# Altium PCB Timebase_PCB.PcbDoc (part 2 of 2)
Units mm, origin at the board's own origin, x right, y up, seen from the top; angles counter-clockwise.
Board outline 50 x 100.01 mm, 4 copper layers (Top Layer, Int1 (GND), Int2 (PWR), Bottom Layer), stack 1.369 mm thick; 60 components, 58 nets, 317 pads, 674 vias.
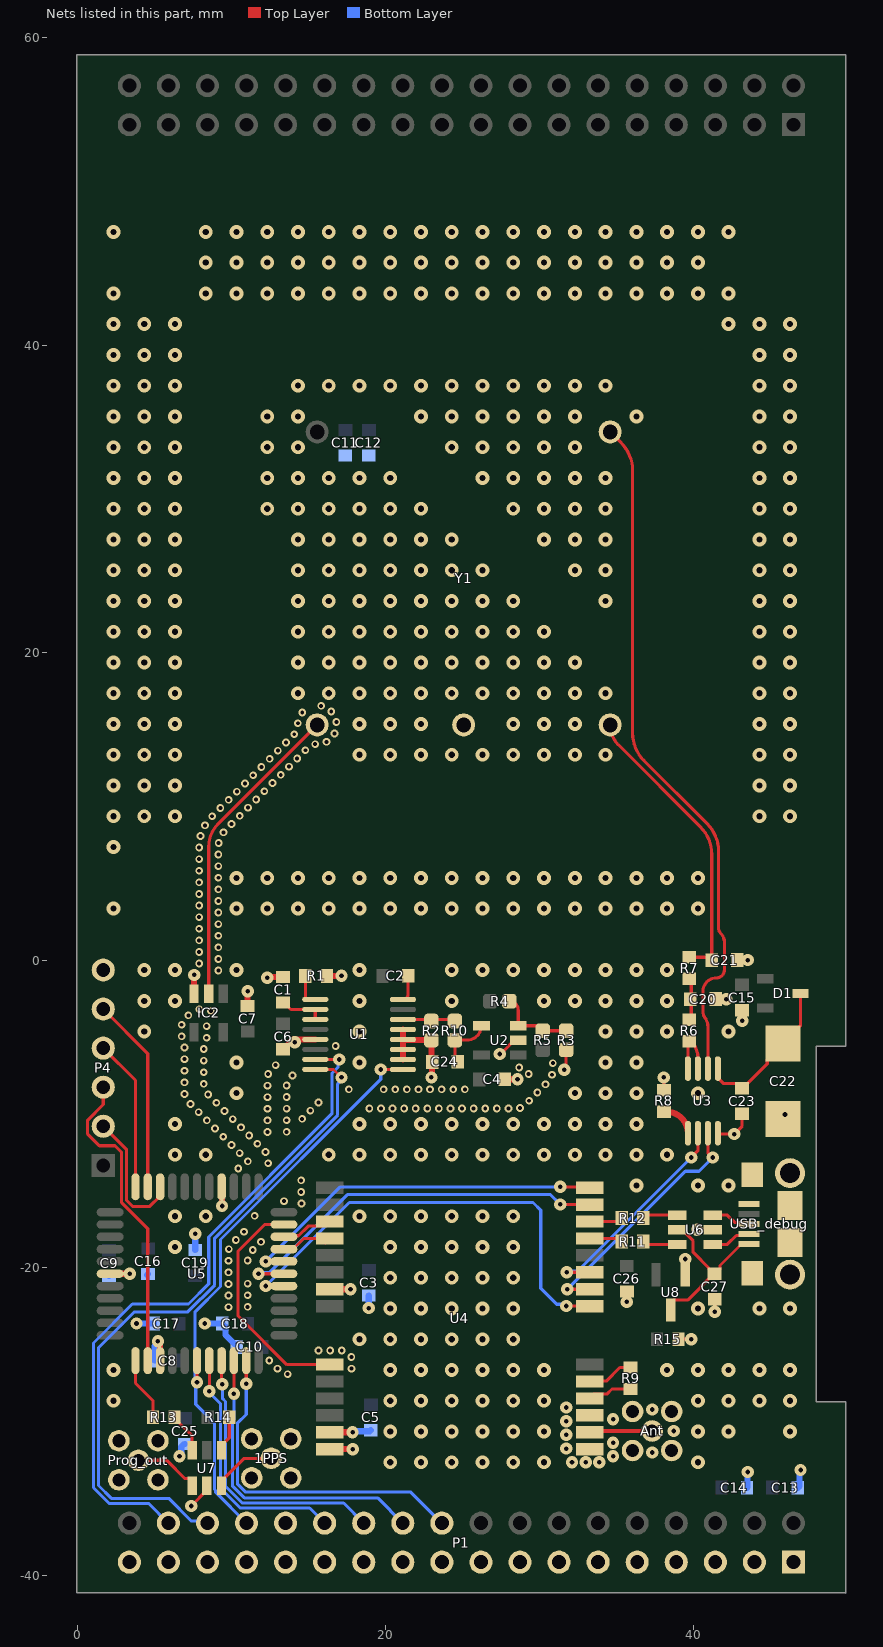
[diagram p4: the nets of this part, all layers, seen from the top]

## Via types
v1: diameter 0.9, hole 0.4, Top Layer to Bottom Layer, tented both sides, 430 vias
v2: diameter 0.5, hole 0.254, Top Layer to Bottom Layer, tented both sides, 163 vias
v3: diameter 0.8, hole 0.3, Top Layer to Bottom Layer, tented both sides, 80 vias
v4: diameter 1.8, hole 1, Top Layer to Bottom Layer, tented both sides, 1 vias

## Nets (pads, with @x,y where several pads share a name; then routed paths per layer and width w, separated by ;. In a path a pad name is that pad's centre, name@x,y a point inside that pad or via, vN(x,y) a via of type N, cw(c..) or ccw(c..) an arc to the next point about the centre after c; other vN are vias at no path point) (continued)
DGND: 1PPS.2 1PPS.3 1PPS.4 1PPS.5 Ant.2 Ant.3 Ant.4 Ant.5 C1.2 C3.1 C4.1 C5.1 C6.1 C7.1 C8.1 C9.1 C10.1 C11.1 C12.1 C13.1 C14.1 C15.1 C16.1 C17.1 C18.1 C19.1 C20.1 C21.1 C22.2 C23.1 C24.1 C25.1 C26.1 C27.1 IC2.3 P1.1 P1.3 P1.5 P1.7 P1.9 P1.11 P1.13 P1.15 P1.17 P1.19 P1.21 P1.23 P1.25 P1.27 P1.28 P1.29 P1.31 P1.33 P1.35 P4.6 Prog_out.2 Prog_out.3 Prog_out.4 Prog_out.5 R1.2 R2.1 R3.2 R8.2 R15.2 U1.5 U1.10 U1.11 U1.12 U1.13 U2.2 U3.8 U4.7 U4.13 U4.14 U4.15 U4.17 U5.4 U5.17 U5.25 U6.2 U7.2 U8.1 USB_debug.5 USB_debug.MH1 USB_debug.MH2 USB_debug.MP1 USB_debug.MP2 USB_debug.MP3 USB_debug.MP4 Y1.2 | length 47.5
  Top Layer w0.203: v3(7.366,-35.486) 8.382,-34.47 U7.2@8.382,-34.17 ; v3@27.62,-5.969 28.382,-5.207 U2.2@28.632,-5.207 ; R3.2@31.616,-5.698 R3.2@31.75,-5.832 v3@31.75,-6.858 ; v3(35.697,-22.215) C26.1@35.697,-21.541 ; R8.2@38.1,-8.444 v3(38.1,-7.62) ; R15.2@39.054,-24.638 v3(39.878,-24.638) ; U8.1@39.492,-20.447 v3(39.492,-19.426) ; v3(40.259,-17.526) U6.2@41.282,-17.526 ; v3(41.412,-22.85) C27.1@41.412,-22.049 ; C20.1@41.48,-2.53 v3(42.154,-2.53) ; U3.8@41.615,-11.244 41.674,-11.303 v3(42.672,-11.303) 43.19,-10.785 C23.1@43.19,-9.984 ; C21.1@42.877,0.01 v3(43.551,0.01) ; v3(43.19,-3.927) C15.1@43.19,-3.253
  Top Layer w0.4: U5.17@2.097,-20.382 v3(3.367,-20.382) ; U5.25@5.347,-26.032 v3@5.347,-24.765 ; IC2.3@7.559,-2.179 v3(7.559,-0.955) ; U5.4@9.347,-14.732 9.376,-14.761 v3(9.376,-15.98) ; C7.1@11.039,-2.97 v3(11.039,-2.022) ; v3@12.515,-1.085 C1.2@13.335,-1.085 ; C6.1@13.345,-5.793 13.395,-5.793 13.595,-5.593 13.595,-5.544 13.988,-5.151 U1.5@15.438,-5.151 ; R1.2@16.194,-1.016 v3(17.145,-1.016) ; U4.14@16.383,-31.789 v3(17.868,-31.789) ; U4.13@16.383,-30.689 v3(17.862,-30.689) ; U4.7@16.383,-21.389 v3(17.727,-21.389) ; U1.10@21.138,-6.451 U1.11@21.138,-5.801 U1.12@21.138,-5.151 ; U1.13@21.138,-4.501 U1.12@21.138,-5.151 ; v3@23.036,-7.444 C24.1@23.036,-6.614 cw(c23.036,-6.565) 22.987,-6.565 R2.1@22.987,-5.197 21.184,-5.197 cw(c21.184,-5.151) U1.12@21.138,-5.151 ; C4.1@27.764,-7.737 v3(28.585,-7.737)
  Bottom Layer w0.4: C9.1@2.022,-20.525 C9.1@2.086,-20.462 ; v3(3.81,-23.622) C17.1@4.953,-23.622 ; C16.1@4.499,-20.462 C16.1@4.562,-20.398 ; C8.1@5.002,-26.025 5.002,-25.078 5.207,-24.873 v3(5.207,-24.765) ; v3(6.605,-32.258) 6.605,-32.15 6.725,-32.03 6.725,-31.647 6.925,-31.447 C25.1@6.975,-31.447 ; C19.1@7.63,-18.845 v3(7.63,-17.79) ; v3(8.255,-23.622) C18.1@9.398,-23.622 9.598,-23.822 9.598,-24.348 10.336,-25.086 C10.1@10.336,-25.136 ; v3(17.862,-30.689) 17.928,-30.623 18.975,-30.623 C5.1@19.04,-30.558 ; v3(18.913,-22.616) C3.1@18.913,-21.795 ; C14.1@43.512,-34.3 43.536,-34.276 43.536,-33.299 v3(43.561,-33.274) ; C13.1@46.814,-34.3 46.913,-34.201 46.913,-33.224 v3(46.99,-33.147)
  other v1: 20.313,-32.643 22.313,-32.643 24.313,-32.643 26.313,-32.643 28.313,-32.643 30.313,-32.643 40.313,-32.643 20.313,-30.643 22.313,-30.643 24.313,-30.643 26.313,-30.643 28.313,-30.643 30.313,-30.643 40.313,-30.643 42.313,-30.643 46.313,-30.643 2.313,-28.643 20.313,-28.643 22.313,-28.643 24.313,-28.643 26.313,-28.643 28.313,-28.643 30.313,-28.643 40.313,-28.643 42.313,-28.643 44.313,-28.643 46.313,-28.643 2.313,-26.643 20.313,-26.643 22.313,-26.643 24.313,-26.643 26.313,-26.643 28.313,-26.643 30.313,-26.643 38.313,-26.643 40.313,-26.643 42.313,-26.643 44.313,-26.643 46.313,-26.643 18.313,-24.643 20.313,-24.643 22.313,-24.643 24.313,-24.643 26.313,-24.643 28.313,-24.643 20.313,-22.643 22.313,-22.643 24.313,-22.643 26.313,-22.643 28.313,-22.643 40.313,-22.643 44.313,-22.643 46.313,-22.643 20.313,-20.643 22.313,-20.643 24.313,-20.643 26.313,-20.643 28.313,-20.643 6.313,-18.643 20.313,-18.643 22.313,-18.643 24.313,-18.643 26.313,-18.643 28.313,-18.643 6.313,-16.643 8.313,-16.643 18.313,-16.643 20.313,-16.643 22.313,-16.643 24.313,-16.643 26.313,-16.643 28.313,-16.643 36.313,-14.643 40.313,-14.643 42.313,-14.643 6.313,-12.643 8.313,-12.643 16.313,-12.643 18.313,-12.643 20.313,-12.643 22.313,-12.643 24.313,-12.643 26.313,-12.643 28.313,-12.643 30.313,-12.643 32.313,-12.643 34.313,-12.643 36.313,-12.643 38.313,-12.643 6.313,-10.643 18.313,-10.643 20.313,-10.643 22.313,-10.643 24.313,-10.643 26.313,-10.643 28.313,-10.643 30.313,-10.643 32.313,-10.643 34.313,-10.643 36.313,-10.643 10.313,-8.643 32.313,-8.643 34.313,-8.643 36.313,-8.643 40.313,-8.643 10.313,-6.643 18.313,-6.643 34.313,-6.643 36.313,-6.643 4.313,-4.643 18.313,-4.643 34.313,-4.643 36.313,-4.643 38.313,-4.643 42.313,-4.643 4.313,-2.643 6.313,-2.643 18.313,-2.643 24.313,-2.643 30.313,-2.643 32.313,-2.643 34.313,-2.643 36.313,-2.643 38.313,-2.643 4.313,-0.643 6.313,-0.643 10.313,-0.643 18.313,-0.643 24.313,-0.643 26.313,-0.643 28.313,-0.643 30.313,-0.643 32.313,-0.643 34.313,-0.643 36.313,-0.643 38.313,-0.643 2.313,3.357 10.313,3.357 12.313,3.357 14.313,3.357 16.313,3.357 18.313,3.357 20.313,3.357 22.313,3.357 24.313,3.357 26.313,3.357 28.313,3.357 30.313,3.357 32.313,3.357 34.313,3.357 36.313,3.357 38.313,3.357 40.313,3.357 10.313,5.357 12.313,5.357 14.313,5.357 16.313,5.357 18.313,5.357 20.313,5.357 22.313,5.357 24.313,5.357 26.313,5.357 28.313,5.357 30.313,5.357 32.313,5.357 34.313,5.357 36.313,5.357 38.313,5.357 40.313,5.357 2.313,7.357 2.313,9.357 4.313,9.357 6.313,9.357 44.313,9.357 46.313,9.357 2.313,11.357 4.313,11.357 6.313,11.357 44.313,11.357 46.313,11.357 2.313,13.357 4.313,13.357 6.313,13.357 18.313,13.357 20.313,13.357 22.313,13.357 24.313,13.357 26.313,13.357 28.313,13.357 30.313,13.357 32.313,13.357 34.313,13.357 44.313,13.357 46.313,13.357 2.313,15.357 4.313,15.357 6.313,15.357 18.313,15.357 20.313,15.357 22.313,15.357 28.313,15.357 30.313,15.357 32.313,15.357 44.313,15.357 46.313,15.357 2.313,17.357 4.313,17.357 6.313,17.357 14.313,17.357 16.313,17.357 18.313,17.357 20.313,17.357 22.313,17.357 24.313,17.357 26.313,17.357 28.313,17.357 30.313,17.357 32.313,17.357 34.313,17.357 44.313,17.357 46.313,17.357 2.313,19.357 4.313,19.357 6.313,19.357 14.313,19.357 16.313,19.357 18.313,19.357 20.313,19.357 22.313,19.357 24.313,19.357 26.313,19.357 28.313,19.357 30.313,19.357 32.313,19.357 44.313,19.357 46.313,19.357 2.313,21.357 4.313,21.357 6.313,21.357 14.313,21.357 16.313,21.357 18.313,21.357 20.313,21.357 22.313,21.357 24.313,21.357 26.313,21.357 28.313,21.357 30.313,21.357 44.313,21.357 46.313,21.357 2.313,23.357 4.313,23.357 6.313,23.357 14.313,23.357 16.313,23.357 18.313,23.357 20.313,23.357 22.313,23.357 24.313,23.357 26.313,23.357 28.313,23.357 34.313,23.357 44.313,23.357 46.313,23.357 2.313,25.357 4.313,25.357 6.313,25.357 14.313,25.357 16.313,25.357 18.313,25.357 20.313,25.357 22.313,25.357 24.313,25.357 26.313,25.357 32.313,25.357 34.313,25.357 44.313,25.357 46.313,25.357 2.313,27.357 4.313,27.357 6.313,27.357 14.313,27.357 16.313,27.357 18.313,27.357 20.313,27.357 22.313,27.357 24.313,27.357 30.313,27.357 32.313,27.357 34.313,27.357 44.313,27.357 46.313,27.357 2.313,29.357 4.313,29.357 6.313,29.357 12.313,29.357 14.313,29.357 16.313,29.357 18.313,29.357 20.313,29.357 22.313,29.357 28.313,29.357 30.313,29.357 32.313,29.357 34.313,29.357 44.313,29.357 46.313,29.357 2.313,31.357 4.313,31.357 6.313,31.357 12.313,31.357 14.313,31.357 16.313,31.357 18.313,31.357 20.313,31.357 26.313,31.357 28.313,31.357 30.313,31.357 32.313,31.357 34.313,31.357 44.313,31.357 46.313,31.357 2.313,33.357 4.313,33.357 6.313,33.357 12.313,33.357 14.313,33.357 24.313,33.357 26.313,33.357 28.313,33.357 30.313,33.357 32.313,33.357 44.313,33.357 46.313,33.357 2.313,35.357 4.313,35.357 6.313,35.357 12.313,35.357 14.313,35.357 22.313,35.357 24.313,35.357 26.313,35.357 28.313,35.357 30.313,35.357 32.313,35.357 36.313,35.357 44.313,35.357 46.313,35.357 2.313,37.357 4.313,37.357 6.313,37.357 14.313,37.357 16.313,37.357 18.313,37.357 20.313,37.357 22.313,37.357 24.313,37.357 26.313,37.357 28.313,37.357 30.313,37.357 32.313,37.357 34.313,37.357 44.313,37.357 46.313,37.357 2.313,39.357 4.313,39.357 6.313,39.357 44.313,39.357 46.313,39.357 2.313,41.357 4.313,41.357 6.313,41.357 42.313,41.357 44.313,41.357 46.313,41.357 2.313,43.357 8.313,43.357 10.313,43.357 12.313,43.357 14.313,43.357 16.313,43.357 18.313,43.357 20.313,43.357 22.313,43.357 24.313,43.357 26.313,43.357 28.313,43.357 30.313,43.357 32.313,43.357 34.313,43.357 36.313,43.357 38.313,43.357 40.313,43.357 42.313,43.357 8.313,45.357 10.313,45.357 12.313,45.357 14.313,45.357 16.313,45.357 18.313,45.357 20.313,45.357 22.313,45.357 24.313,45.357 26.313,45.357 28.313,45.357 30.313,45.357 32.313,45.357 34.313,45.357 36.313,45.357 38.313,45.357 40.313,45.357 2.313,47.357 8.313,47.357 10.313,47.357 12.313,47.357 14.313,47.357 16.313,47.357 18.313,47.357 20.313,47.357 22.313,47.357 24.313,47.357 26.313,47.357 28.313,47.357 30.313,47.357 32.313,47.357 34.313,47.357 36.313,47.357 38.313,47.357 40.313,47.357 42.313,47.357
  other v2: 13.64,-26.913 12.975,-26.557 17.797,-26.554 12.442,-26.024 17.779,-25.8 15.649,-25.375 16.403,-25.375 17.157,-25.375 9.79,-22.557 11.038,-22.537 9.79,-21.803 11.038,-21.783 9.79,-21.049 11.038,-21.029 9.79,-20.295 9.79,-19.541 11.038,-19.521 11.374,-18.846 9.817,-18.787 11.907,-18.312 10.27,-18.185 10.803,-17.651 11.495,-16.62 14.542,-15.818 13.408,-15.662 14.519,-15.064 14.519,-14.31 10.428,-13.542 12.371,-13.2 11.051,-13.076 10.518,-12.543 12.199,-12.466 9.985,-12.01 11.669,-11.93 9.452,-11.477 11.136,-11.397 12.33,-11.167 13.578,-11.157 8.919,-10.944 10.603,-10.864 8.386,-10.411 12.33,-10.413 13.578,-10.403 10.07,-10.33 14.584,-10.315 7.852,-9.877 9.536,-9.797 15.117,-9.782 12.33,-9.659 13.578,-9.649 18.95,-9.641 19.704,-9.641 20.458,-9.641 21.212,-9.641 21.966,-9.641 22.72,-9.641 23.474,-9.641 24.228,-9.641 24.982,-9.641 25.736,-9.641 26.49,-9.641 27.244,-9.641 27.998,-9.641 28.751,-9.606 7.319,-9.344 9.003,-9.264 15.65,-9.249 29.34,-9.134 12.33,-8.905 13.578,-8.895 8.47,-8.731 6.935,-8.695 29.873,-8.601 17.619,-8.393 19.881,-8.393 20.635,-8.393 21.389,-8.393 22.143,-8.393 22.897,-8.393 23.651,-8.393 24.405,-8.393 25.159,-8.393 12.33,-8.151 13.578,-8.141 30.406,-8.068 8.183,-8.034 6.935,-7.941 13.957,-7.489 30.834,-7.447 12.376,-7.398 29.307,-7.403 8.183,-7.28 6.935,-7.187 28.689,-6.971 12.861,-6.821 30.881,-6.694 8.183,-6.526 6.935,-6.433 8.183,-5.772 6.935,-5.679 16.76,-5.579 8.373,-5.042 6.745,-4.95 8.373,-4.288 6.745,-4.196 7.181,-3.581 8.645,-3.293 7.9,-3.178 9.133,-0.669 7.885,-0.215 9.133,0.085 7.885,0.539 9.133,0.839 7.885,1.293 9.133,1.593 7.885,2.047 9.133,2.347 7.885,2.801 9.133,3.101 7.885,3.555 9.133,3.855 7.885,4.309 9.133,4.609 7.885,5.063 9.133,5.363 7.885,5.817 9.133,6.117 7.885,6.571 9.133,6.871 7.885,7.325 9.153,7.625 7.979,8.073 9.465,8.312 8.269,8.769 9.99,8.853 8.735,9.362 10.523,9.386 9.268,9.895 11.056,9.919 9.801,10.428 11.59,10.452 10.334,10.961 12.123,10.986 10.868,11.495 12.656,11.519 11.401,12.028 13.189,12.052 11.934,12.561 13.722,12.585 12.467,13.094 14.255,13.118 13,13.627 14.788,13.651 15.429,14.049 13.533,14.16 16.168,14.201 14.066,14.694 16.691,14.744 14.301,15.41 16.805,15.489 14.587,16.108 16.476,16.168 15.82,16.54
  other v3: 32.131,-32.639 33.02,-32.639 33.909,-32.639 34.798,-32.258 37.338,-32.004 31.75,-31.75 34.798,-31.369 31.75,-30.861 38.735,-30.607 31.75,-29.972 34.798,-29.845 37.338,-29.21 31.75,-29.083 45.974,-10.033 22.987,-7.62 31.623,-7.112 27.432,-6.096 14.097,-5.334 12.319,-1.143
"Disciplined 30.72 MHz": U4.9 U5.43 | length 15.2
  Top Layer w0.203: U5.43@13.397,-17.182 12.155,-17.182 10.414,-18.923 10.414,-23.114 13.589,-26.289 U4.9@16.383,-26.289
EFC: C21.2 R7.1 Y1.3 | length 19.4
  Top Layer w0.203: Y1.3@34.608,15.303 ccw(c36.448,15.303) 35.147,14.002 40.473,8.676 cw(c38.677,6.88) 41.217,6.88 C21.2@41.217,0 ccw(c40.753,-0.464) 40.753,0.192 R7.1@39.751,0.192
External_freq_out: R13.1 U5.23 | length 4.2
  Top Layer w0.203: U5.23@3.747,-26.032 3.747,-27.496 4.888,-28.637 R13.1@4.888,-29.718
Freq_control_b0: P1.20 U5.32 | length 22.9
  Top Layer w0.203: v3(10.947,-27.534) U5.32@10.947,-26.032
  Top Layer w0.4: P1.20@23.667,-36.596 P1.20@23.667,-36.298
  Bottom Layer w0.203: v3(10.947,-27.534) 10.947,-29.533 10.375,-30.106 10.375,-34.04 10.918,-34.583 21.655,-34.583 P1.20@23.667,-36.596
Freq_control_b1: P1.22 U5.31 | length 20.3
  Top Layer w0.203: v3(10.147,-28.181) U5.31@10.147,-26.032
  Bottom Layer w0.203: v3(10.147,-28.181) 10.147,-29.866 10.045,-29.969 10.045,-34.176 10.826,-34.958 19.489,-34.958 P1.22@21.127,-36.596
Freq_control_b2: P1.24 U5.30 | length 18
  Top Layer w0.203: v3@9.347,-27.356 U5.30@9.347,-26.032
  Bottom Layer w0.203: v3(9.398,-27.559) 9.398,-28.488 9.601,-28.691 9.601,-34.199 10.689,-35.288 17.279,-35.288 P1.24@18.587,-36.596
Freq_control_b3: P1.26 U5.29 | length 16.3
  Top Layer w0.203: v3(8.547,-28.029) U5.29@8.547,-26.032
  Bottom Layer w0.203: v3(8.547,-28.029) 8.547,-28.103 9.271,-28.827 9.271,-34.336 10.552,-35.618 15.069,-35.618 P1.26@16.047,-36.596
FREQ_PHASE_IN0: U4.27 U5.39 | length 25.6
  Top Layer w0.203: v3(11.746,-20.382) U5.39@13.397,-20.382 ; v3(31.369,-15.875) 33.26,-15.875 U4.27@33.274,-15.889
  Bottom Layer w0.203: v3(11.746,-20.382) 11.812,-20.316 12.45,-20.316 17.526,-15.24 30.734,-15.24 v3(31.369,-15.875)
FREQ_PHASE_IN1: U4.21 U5.38 | length 30.3
  Top Layer w0.203: v3(12.219,-21.182) U5.38@13.397,-21.182 ; v3(31.75,-22.479) 33.264,-22.479 U4.21@33.274,-22.489
  Bottom Layer w0.203: v3(12.219,-21.182) 17.653,-15.748 29.591,-15.748 30.099,-16.256 30.099,-21.336 31.128,-22.365 31.636,-22.365 v3(31.75,-22.479)
Hysteresis: R3.1 R4.1 R5.2 U2.3 | length 5.2
  Top Layer w0.203: R4.1@28.057,-2.667 cw(c28.057,-3.242) 28.632,-3.242 U2.3@28.632,-4.257 29.901,-4.257 cw(c29.901,-4.582) R5.2@30.226,-4.582 R3.1@31.75,-4.582
Net1PPS_1: 1PPS.1 U7.3 | length 4.2
  Top Layer w0.203: U7.3@9.332,-34.17 9.332,-33.87 10.817,-32.385 1PPS.1@12.573,-32.385
NetAnt_1: Ant.1 U4.16 | length 4.1
  Top Layer w0.203: U4.16@33.274,-30.689 U4.16@33.356,-30.607
  Top Layer w0.245: U4.16@33.356,-30.607 Ant.1@37.338,-30.607
NetC1_1: C1.1 U1.2 U1.3 | length 2.9
  Top Layer w0.203: C1.1@13.345,-2.745 13.395,-2.745 13.851,-3.201 U1.2@15.438,-3.201 U1.3@15.438,-3.851
NetC2_2: C2.2 U1.16 | length 1.7
  Top Layer w0.203: U1.16@21.138,-2.551 ccw(c21.138,-2.217) 21.472,-2.217 C2.2@21.472,-1.006
NetC20_2: C20.2 R6.1 R7.2 | length 2.7
  Top Layer w0.203: R7.2@39.751,-1.208 cw(c39.444,-1.515) 39.878,-1.515 39.878,-2.54 R6.1@39.878,-3.872
NetC22_1: C22.1 C23.2 D1.3 U3.1 | length 10.2
  Top Layer w0.203: U3.1@41.615,-7.044 41.615,-7.644 41.996,-8.025 42.881,-8.025 C23.2@43.18,-8.324 43.23,-8.324 44.823,-6.73 44.823,-6.448 C22.1@45.847,-5.424 45.847,-5.374 46.99,-4.231 D1.3@46.99,-2.159
NetC24_2: C24.2 R10.1 U2.4 | length 3.8
  Top Layer w0.203: C24.2@24.696,-6.604 cw(c24.696,-6.419) 24.511,-6.419 R10.1@24.511,-5.197 25.292,-5.197 ccw(c25.292,-4.257) U2.4@26.232,-4.257
NetC27_2: C27.2 U6.5 U8.3 USB_debug.1 | length 11.3
  Top Layer w0.203: U8.3@38.542,-22.747 38.542,-22.297 38.74,-22.099 39.642,-22.099 C27.2@41.352,-20.389 ; U6.5@38.982,-17.526 39.282,-17.526 40.005,-18.249 40.005,-18.992 41.053,-20.04 41.053,-20.09 C27.2@41.352,-20.389 ; USB_debug.1@43.628,-18.445 43.153,-18.445 41.751,-19.847 41.751,-20.09 41.452,-20.389 C27.2@41.402,-20.389 C27.2@41.352,-20.389
NetIC2_2: IC2.2 Y1.1 | length 20.3
  Top Layer w0.203: IC2.2@8.509,-2.179 8.509,7.387 ; 8.509,7.388 cw(c10.594,7.39) 9.123,8.868 Y1.1@15.558,15.303
NetP4_2: P4.2 U5.9 | length 8.8
  Top Layer w0.203: P4.2@1.651,-10.795 1.905,-10.795 1.905,-11.049 3.175,-12.319 3.175,-15.621 3.556,-16.002 4.677,-16.002 5.347,-15.332 U5.9@5.347,-14.732
NetP4_3: P4.3 U5.24 | length 20.4
  Top Layer w0.203: P4.3@1.651,-8.255 1.651,-9.383 0.635,-10.399 0.635,-11.303 1.397,-12.065 2.413,-12.065 2.845,-12.497 2.845,-15.758 4.547,-17.46 U5.24@4.547,-26.032
NetP4_4: P4.4 U5.11 | length 9.9
  Top Layer w0.203: P4.4@1.651,-5.715 3.747,-7.811 U5.11@3.747,-14.732
NetP4_5: P4.5 U5.10 | length 12.8
  Top Layer w0.203: P4.5@1.651,-3.175 4.547,-6.071 U5.10@4.547,-14.732
NetProg_out_1: Prog_out.1 U7.1 | length 4.3
  Top Layer w0.203: Prog_out.1@3.937,-32.512 5.774,-32.512 6.97,-33.708 7.234,-33.708 7.432,-33.906 U7.1@7.432,-34.17
NetR1_1: R1.1 U1.1 | length 2.4
  Top Layer w0.203: R1.1@14.524,-1 R1.1@14.667,-1.143 ; R1.1@14.794,-1.016 14.794,-2.483 14.862,-2.551 U1.1@15.438,-2.551 U1.1@15.41,-2.523
NetR6_2: R6.2 U3.3 U3.4 | length 3.7
  Top Layer w0.203: U3.4@39.665,-7.044 39.665,-5.786 cw(c40.392,-5.786) 39.878,-5.272 cw(c38.823,-6.327) 40.315,-6.327 U3.3@40.315,-7.044
NetR8_1: R8.1 U3.5 | length 2.4
  Top Layer w0.4: R8.1@38.1,-9.844 38.265,-9.844 cw(c38.265,-11.244) U3.5@39.665,-11.244
NetR9_1: R9.1 U4.19 | length 3
  Top Layer w0.203: U4.19@33.274,-27.389 33.301,-27.362 34.36,-27.362 35.244,-26.478 R9.1@35.941,-26.478
NetR9_2: R9.2 U4.18 | length 2.9
  Top Layer w0.203: U4.18@33.274,-28.489 33.573,-28.19 34.421,-28.19 34.733,-27.878 R9.2@35.941,-27.878
NetR11_1: R11.1 U4.25 | length 2.4
  Top Layer w0.203: U4.25@33.274,-18.089 R11.1@35.677,-18.089
NetR11_2: R11.2 U6.6 | length 2.3
  Top Layer w0.203: R11.2@36.768,-18.288 36.956,-18.476 U6.6@38.982,-18.476
NetR12_1: R12.1 U4.26 | length 2.4
  Top Layer w0.203: U4.26@33.274,-16.989 R12.1@35.651,-16.989
NetR12_2: R12.2 U6.4 | length 2.3
  Top Layer w0.203: R12.2@36.768,-16.764 36.956,-16.576 U6.4@38.982,-16.576
NetR13_2: R13.2 U7.6 | length 2.6
  Top Layer w0.203: R13.2@6.288,-29.718 6.288,-29.768 7.432,-30.912 U7.6@7.432,-31.87
NetR14_2: R14.2 U7.4 | length 2.4
  Top Layer w0.203: U7.4@9.332,-31.87 9.332,-31.57 9.844,-31.058 R14.2@9.844,-29.718
NetU6_1: U6.1 USB_debug.2 | length 2.6
  Top Layer w0.203: U6.1@41.282,-18.476 42.23,-18.476 42.813,-17.893 43.53,-17.893 USB_debug.2@43.628,-17.795
NetU6_3: U6.3 USB_debug.3 | length 2.6
  Top Layer w0.203: U6.3@41.282,-16.576 42.23,-16.576 42.701,-17.047 43.53,-17.047 USB_debug.3@43.628,-17.145
SCL_DAC: U3.6 U4.23 | length 14.4
  Top Layer w0.203: v3(31.781,-20.289) U4.23@33.274,-20.289 ; v3(39.878,-12.827) 40.315,-12.39 U3.6@40.315,-11.244
  Bottom Layer w0.203: v3(31.781,-20.289) 31.851,-20.219 32.486,-20.219 v3(39.878,-12.827)
SDA_DAC: U3.7 U4.22 | length 16.2
  Top Layer w0.203: v3(31.824,-21.389) U4.22@33.274,-21.389 ; U3.7@40.965,-11.244 40.965,-12.517 v3(41.275,-12.827)
  Bottom Layer w0.203: v3(31.824,-21.389) 39.497,-13.716 40.386,-13.716 v3(41.275,-12.827)
SPI2_MOSI: P1.32 U1.8 | length 45.2
  Top Layer w0.203: U1.8@15.24,-7.15 U1.8@15.289,-7.101 ; U1.8@15.438,-7.101 16.626,-7.101 v3(17.145,-7.62)
  Bottom Layer w0.203: P1.32@8.427,-36.596 8.287,-36.456 7.373,-36.456 5.906,-34.989 2.182,-34.989 1.346,-34.153 1.346,-25.197 3.683,-22.86 7.153,-22.86 8.89,-21.123 8.89,-18.075 16.891,-10.074 16.891,-8.036 17.145,-7.782 v3(17.145,-7.62)
SPI2_NSS: P1.30 U1.9 U5.28 | length 38.8
  Top Layer w0.203: v3(7.747,-27.432) U5.28@7.747,-26.032 ; v3(19.696,-7.101) U1.9@21.138,-7.101
  Bottom Layer w0.203: P1.30@10.967,-36.596 8.966,-34.595 8.966,-34.498 8.884,-34.415 8.884,-30.093 7.664,-28.873 7.664,-27.515 v3(7.747,-27.432) 7.633,-27.318 7.633,-27.021 7.626,-27.015 7.626,-22.854 9.271,-21.209 9.271,-18.161 19.696,-7.736 v3(19.696,-7.101)
SPI2_SCK: P1.34 U1.7 | length 45
  Top Layer w0.203: P1.34@5.639,-36.348 P1.34@5.887,-36.596 ; U1.7@14.763,-6.451 U1.7@15.438,-6.451 v3(16.992,-6.451)
  Bottom Layer w0.203: P1.34@5.887,-36.596 4.61,-35.319 2.045,-35.319 1.016,-34.29 1.016,-24.884 3.548,-22.352 7.195,-22.352 8.509,-21.038 8.509,-17.99 16.516,-9.982 16.516,-7.36 16.913,-6.963 16.913,-6.53 v3(16.992,-6.451)
"Syntesis freq": R2.2 R10.2 U1.14 | length 3.4
  Top Layer w0.203: U1.14@21.138,-3.851 24.415,-3.851 cw(c24.415,-3.947) R10.2@24.511,-3.947
TIMEPULSE: U4.28 U5.40 | length 24.3
  Top Layer w0.203: v3(12.216,-19.582) U5.40@13.397,-19.582 ; v3(31.369,-14.732) 33.217,-14.732 U4.28@33.274,-14.789
  Bottom Layer w0.203: v3(12.216,-19.582) 17.066,-14.732 v3(31.369,-14.732)
UART_RXD: U4.4 U5.41 | length 4.1
  Top Layer w0.203: U5.41@13.016,-18.909 13.857,-18.909 14.677,-18.089 U4.4@16.383,-18.089 U4.4@16.084,-18.388
UART_TXD: U4.3 U5.42 | length 3.8
  Top Layer w0.203: U5.42@13.016,-18.109 13.209,-17.916 14.342,-17.916 14.973,-17.285 16.087,-17.285 U4.3@16.383,-16.989
VREF: U3.2 Y1.4 | length 45
  Top Layer w0.203: Y1.4@34.608,34.353 35.324,33.637 cw(c33.528,31.841) 36.068,31.841 36.068,14.768 ccw(c38.608,14.768) 36.812,12.972 40.912,8.872 cw(c39.116,7.076) 41.656,7.076 41.656,2.085 ccw(c42.09,2.085) 41.783,1.778 cw(c41.17,1.165) 42.037,1.165 42.037,-0.635 cw(c41.529,-0.635) 41.529,-1.143 ccw(c41.529,-2.032) 40.64,-2.032 40.64,-3.355 ccw(c41.27,-3.355) 40.698,-3.618 ccw(c41.27,-3.355) 40.825,-3.8 cw(c39.855,-4.341) 40.965,-4.341 U3.2@40.965,-7.044
pads on no net: D1.2 IC2.1 P2.1 P2.2 P2.3 P2.4 P2.5 P2.6 P2.7 P2.8 P2.9 P2.10 P2.11 P2.12 P2.13 P2.14 P2.15 P2.16 P2.17 P2.18 P2.19 P2.20 P2.21 P2.22 P2.23 P2.24 P2.25 P2.26 P2.27 P2.28 P2.29 P2.30 P2.31 P2.32 P2.33 P2.34 P2.35 P2.36 U4.1 U4.2 U4.5 U4.8 U4.10 U4.12 U4.20 U5.3 U5.5 U5.6 U5.7 U5.8 U5.12 U5.13 U5.14 U5.16 U5.18 U5.19 U5.20 U5.21 U5.22 U5.37 USB_debug.4

## Polygon pours and split planes (outlines as drawn)
DGND on Top Layer "Top Layer-DGND" (solid, pour order 200): 15.853,16.789 16.046,16.738 16.227,16.662 16.401,16.562 16.556,16.443 16.698,16.301 16.817,16.146 16.917,15.972 16.993,15.791 17.044,15.598 17.07,15.403 17.07,15.203 17.044,15.008 16.993,14.815 16.917,14.634 16.817,14.46 16.698,14.305 16.556,14.163 16.401,14.044 16.227,13.944 16.046,13.868 15.853,13.817 15.658,13.791 15.458,13.791 15.304,13.811 9.742,8.249 9.741,8.248 9.735,8.243 9.587,8.063 9.475,7.854 9.406,7.627 9.384,7.397 9.384,7.391 9.384,7.39 9.384,7.388 9.384,7.387 9.384,-1.082 9.472,-1.196 9.549,-1.381 9.575,-1.579 9.575,-2.779 9.549,-2.977 9.472,-3.162 9.35,-3.32 9.192,-3.442 9.007,-3.519 8.809,-3.545 8.209,-3.545 8.011,-3.519 7.826,-3.442 7.668,-3.32 7.546,-3.162 7.469,-2.977 7.443,-2.779 7.443,-1.579 7.469,-1.381 7.546,-1.196 7.634,-1.082 7.634,7.372 7.631,7.387 7.636,7.424 7.635,7.465 7.677,7.894 7.694,7.967 7.706,8.041 7.832,8.453 7.862,8.522 7.889,8.592 8.092,8.972 8.136,9.033 8.175,9.097 8.449,9.43 8.482,9.461 8.505,9.49 8.515,9.498 14.066,15.049 14.046,15.203 14.046,15.403 14.072,15.598 14.123,15.791 14.199,15.972 14.299,16.146 14.418,16.301 14.56,16.443 14.715,16.562 14.889,16.662 15.07,16.738 15.263,16.789 15.458,16.815 15.658,16.815
DGND on Top Layer "Top Layer-DGND 1" (solid, pour order 199): 188 vertices, not listed, extent 9.539,-27.455 18.049,-16.136
DGND on Top Layer "Top Layer-DGND 2" (solid, pour order 198): 267 vertices, not listed, extent 11.753,-17.428 31.471,-4.587
DGND on Top Layer "Top Layer-DGND 3" (solid, pour order 197): 247 vertices, not listed, extent 9.901,-16.877 17.055,-4.857
DGND on Top Layer "Top Layer-DGND 4" (solid, pour order 196): 8.057,-3.339 8.242,-3.416 8.4,-3.538 8.522,-3.696 8.599,-3.881 8.625,-4.079 8.625,-5.279 8.599,-5.477 8.522,-5.662 8.434,-5.776 8.434,-8.339 12.366,-12.271 12.397,-12.311 12.432,-12.346 12.457,-12.39 12.488,-12.43 12.507,-12.476 12.532,-12.519 12.564,-12.597 12.577,-12.645 12.596,-12.692 12.603,-12.742 12.616,-12.79 12.616,-12.84 12.622,-12.89 12.622,-13.569 12.643,-13.599 12.665,-13.644 12.693,-13.686 12.709,-13.734 12.731,-13.779 12.741,-13.828 12.757,-13.875 12.778,-13.983 12.783,-14.058 12.793,-14.132 12.793,-15.332 12.783,-15.406 12.778,-15.481 12.757,-15.589 12.741,-15.636 12.731,-15.685 12.709,-15.73 12.693,-15.778 12.665,-15.82 12.643,-15.865 12.582,-15.956 12.549,-15.993 12.521,-16.035 12.483,-16.068 12.45,-16.106 12.408,-16.134 12.371,-16.167 12.28,-16.228 12.235,-16.25 12.193,-16.278 12.145,-16.294 12.1,-16.316 12.051,-16.326 12.004,-16.342 11.896,-16.363 11.846,-16.367 11.797,-16.376 11.747,-16.373 11.697,-16.376 11.648,-16.367 11.598,-16.363 11.49,-16.342 11.443,-16.326 11.394,-16.316 11.349,-16.294 11.301,-16.278 11.259,-16.25 11.214,-16.228 11.123,-16.167 11.086,-16.134 11.044,-16.106 11.011,-16.068 10.973,-16.035 10.945,-15.993 10.912,-15.956 10.851,-15.865 10.829,-15.82 10.801,-15.778 10.785,-15.73 10.763,-15.685 10.753,-15.636 10.737,-15.589 10.716,-15.481 10.711,-15.406 10.701,-15.332 10.701,-14.132 10.711,-14.058 10.716,-13.983 10.737,-13.875 10.753,-13.828 10.763,-13.779 10.785,-13.734 10.801,-13.686 10.829,-13.644 10.851,-13.599 10.872,-13.569 10.872,-13.253 6.94,-9.321 6.909,-9.281 6.874,-9.246 6.849,-9.202 6.818,-9.162 6.799,-9.116 6.774,-9.073 6.742,-8.995 6.729,-8.947 6.71,-8.9 6.703,-8.85 6.69,-8.802 6.69,-8.752 6.684,-8.702 6.684,-5.776 6.596,-5.662 6.519,-5.477 6.493,-5.279 6.493,-4.079 6.519,-3.881 6.596,-3.696 6.718,-3.538 6.876,-3.416 7.061,-3.339 7.259,-3.313 7.859,-3.313
DGND on Top Layer "DGND_L01_P036" (solid, pour order 36): 50.038,2.032 -0.127,2.032 -0.254,1.905 -0.127,1.778 -0.127,-41.021 49.911,-41.021 49.911,-34.417 49.911,-5.588
DGND on Top Layer "DGND_L01_P000" (solid, pour order 0): 1.524,4.699 1.524,2.794 ccw(c2.921,2.794) 2.921,1.397 47.117,1.397 ccw(c47.117,2.794) 48.514,2.794 48.514,47.371 ccw(c47.498,47.371) 47.498,48.387 2.54,48.387 ccw(c2.54,47.244) 1.397,47.244
DGND on Int1 (GND) "DGND_L02_P033" (solid, pour order 33): 1.578,2.387 1.578,-40.694 2.032,-41.148 48.008,-41.148 48.008,1.709
DGND on Int1 (GND) "DGND_L02_P001" (solid, pour order 1): 1.524,4.699 1.524,2.794 ccw(c2.921,2.794) 2.921,1.397 47.117,1.397 ccw(c47.117,2.794) 48.514,2.794 48.514,47.371 ccw(c47.498,47.371) 47.498,48.387 2.54,48.387 ccw(c2.54,47.244) 1.397,47.244
DGND on Bottom Layer "DGND_L04_P037" (solid, pour order 37): 49.784,-41.275 -0.127,-41.275 -0.127,1.651 0,1.778 49.657,1.778 49.657,-22.987 47.752,-24.892 29.083,-24.892 28.956,-24.765 28.956,-34.798 40.64,-34.798 45.339,-30.099 49.784,-30.099
DGND on Bottom Layer "DGND_L04_P022" (solid, pour order 22): 11.43,38.481 37.846,38.481 37.846,12.319 12.573,12.319
+5V on Int2 (PWR) "+5V_L03_P035" (solid, pour order 35): 37.719,-35.306 37.719,-41.021 49.784,-41.021 49.911,-41.148 50.038,-41.021 50.038,1.016 48.387,2.667 37.465,2.667 37.465,-22.86 41.021,-26.416 41.021,-35.306
+3.3V on Int2 (PWR) "+3.3V_L03_P034" (solid, pour order 34): -0.254,-41.148 -0.127,-41.021 -0.127,1.143 36.703,1.143 36.83,1.016 36.83,-12.319 21.717,-12.319 19.939,-14.097 19.939,-35.433 36.576,-35.433 37.338,-36.195 36.576,-36.957 36.576,-41.021

## Keep-outs
Keep-Out Layer:
  circle w0.15: c4.953,4.831 r2.1
  circle w0.15: c44.953,44.831 r2.1
  circle w0.15: c44.953,4.831 r2.1
  circle w0.15: c4.953,44.831 r2.1
  lines w0.254: 49.911,-5.588 48.006,-5.588 48.006,-13.208 48.006,-21.082 48.006,-28.702 49.911,-28.702 49.911,-41.148 49.899,-41.136 48.399,-41.136 -0.063,-41.136 -0.063,-20.13 -0.063,57.594 -0.063,58.864 0.318,58.864 49.937,58.864 49.937,-5.588 ; 7.684,9.715 10.336,12.367 ccw(c8.168,14.535) 11.234,14.535 11.234,34.994 ccw(c8.168,34.994) 10.336,37.162 7.684,39.814 7.684,9.715 ; 9.97,7.429 12.755,10.214 cw(c14.923,8.046) 14.923,11.112 34.989,11.112 cw(c34.989,8.046) 37.157,10.214 39.942,7.429 9.97,7.429 ; 9.97,42.1 12.628,39.442 ccw(c14.796,41.61) 14.796,38.544 32.449,38.544 35.116,38.544 ccw(c35.116,41.61) 37.284,39.442 39.942,42.1 9.97,42.1 ; 38.672,14.541 ccw(c41.738,14.541) 39.57,12.373 42.228,9.715 42.228,39.814 39.57,37.156 ccw(c41.738,34.988) 38.672,34.988 38.672,14.541

## Other copper
Top Layer:
  pour cut-out: 15.786,16.282 15.817,16.271 15.85,16.265 16.032,16.19 16.059,16.171 16.089,16.156 16.245,16.037 16.267,16.012 16.292,15.99 16.411,15.834 16.426,15.804 16.445,15.777 16.52,15.595 16.526,15.562 16.537,15.531 16.563,15.336 16.56,15.303 16.563,15.27 16.537,15.075 16.526,15.044 16.52,15.011 16.445,14.829 16.426,14.802 16.411,14.772 16.292,14.616 16.267,14.594 16.245,14.569 16.089,14.45 16.059,14.435 16.032,14.416 15.85,14.341 15.817,14.335 15.786,14.324 15.591,14.298 15.558,14.301 15.525,14.298 15.33,14.324 15.299,14.335 15.266,14.341 15.156,14.387 9.38,8.611 9.368,8.603 9.159,8.349 9,8.051 8.902,7.727 8.87,7.403 8.873,7.389 8.873,7.388 8.873,7.387 8.873,-1.338 8.906,-1.345 8.988,-1.4 9.043,-1.482 9.063,-1.579 9.063,-2.779 9.043,-2.876 8.988,-2.958 8.906,-3.013 8.809,-3.033 8.209,-3.033 8.112,-3.013 8.03,-2.958 7.975,-2.876 7.955,-2.779 7.955,-1.579 7.975,-1.482 8.03,-1.4 8.112,-1.345 8.145,-1.338 8.145,7.361 8.145,7.364 8.144,7.366 8.145,7.376 8.145,7.378 8.143,7.388 8.146,7.4 8.144,7.415 8.187,7.844 8.194,7.868 8.196,7.893 8.321,8.305 8.333,8.327 8.34,8.351 8.543,8.731 8.559,8.75 8.571,8.772 8.844,9.105 8.858,9.117 8.866,9.127 8.873,9.132 8.879,9.14 8.884,9.144 8.885,9.144 14.642,14.901 14.596,15.011 14.59,15.044 14.579,15.075 14.553,15.27 14.556,15.303 14.553,15.336 14.579,15.531 14.59,15.562 14.596,15.595 14.671,15.777 14.69,15.804 14.705,15.834 14.824,15.99 14.849,16.012 14.871,16.037 15.027,16.156 15.057,16.171 15.084,16.19 15.266,16.265 15.299,16.271 15.33,16.282 15.525,16.308 15.558,16.305 15.591,16.308
  pour cut-out: 14.022,-16.653 14.047,-16.653 14.154,-16.674 14.245,-16.712 14.336,-16.773 14.406,-16.843 14.467,-16.934 14.505,-17.025 14.526,-17.132 14.526,-17.232 14.505,-17.339 14.467,-17.43 14.406,-17.521 14.336,-17.591 14.245,-17.652 14.154,-17.69 14.047,-17.711 14.022,-17.711 13.997,-17.716 12.797,-17.716 12.772,-17.711 12.747,-17.711 12.64,-17.69 12.549,-17.652 12.458,-17.591 12.412,-17.546 12.306,-17.546 10.778,-19.074 10.778,-22.963 13.74,-25.925 15.229,-25.925 15.229,-25.889 15.249,-25.792 15.304,-25.71 15.386,-25.655 15.483,-25.635 17.283,-25.635 17.38,-25.655 17.462,-25.71 17.517,-25.792 17.537,-25.889 17.537,-26.689 17.517,-26.786 17.462,-26.868 17.38,-26.923 17.283,-26.943 15.483,-26.943 15.386,-26.923 15.304,-26.868 15.249,-26.786 15.229,-26.689 15.229,-26.653 13.589,-26.653 13.492,-26.633 13.414,-26.601 13.381,-26.579 13.332,-26.546 10.157,-23.371 10.102,-23.289 10.07,-23.211 10.05,-23.114 10.05,-18.923 10.07,-18.826 10.102,-18.748 10.124,-18.715 10.157,-18.666 11.898,-16.925 11.98,-16.87 11.99,-16.866 12.058,-16.838 12.116,-16.826 12.155,-16.818 12.412,-16.818 12.458,-16.773 12.549,-16.712 12.64,-16.674 12.747,-16.653 12.772,-16.653 12.797,-16.648 13.997,-16.648
  pour cut-out: 170 vertices and 0 holes, not listed, extent 12.268,-16.916 30.959,-5.099
  pour cut-out: 158 vertices and 0 holes, not listed, extent 10.413,-16.366 16.54,-5.369
  pour cut-out: 7.956,-3.845 8.038,-3.9 8.093,-3.982 8.113,-4.079 8.113,-5.279 8.093,-5.376 8.038,-5.458 7.956,-5.513 7.923,-5.52 7.923,-8.551 12.004,-12.633 12.059,-12.715 12.091,-12.793 12.111,-12.89 12.111,-13.747 12.156,-13.793 12.217,-13.884 12.255,-13.975 12.276,-14.082 12.276,-14.107 12.281,-14.132 12.281,-15.332 12.276,-15.357 12.276,-15.382 12.255,-15.489 12.217,-15.58 12.156,-15.671 12.086,-15.741 11.995,-15.802 11.904,-15.84 11.797,-15.861 11.697,-15.861 11.59,-15.84 11.499,-15.802 11.408,-15.741 11.338,-15.671 11.277,-15.58 11.239,-15.489 11.218,-15.382 11.218,-15.357 11.213,-15.332 11.213,-14.132 11.218,-14.107 11.218,-14.082 11.239,-13.975 11.277,-13.884 11.338,-13.793 11.383,-13.747 11.383,-13.041 7.302,-8.959 7.247,-8.877 7.231,-8.838 7.215,-8.799 7.195,-8.702 7.195,-5.52 7.162,-5.513 7.08,-5.458 7.025,-5.376 7.005,-5.279 7.005,-4.079 7.025,-3.982 7.08,-3.9 7.162,-3.845 7.259,-3.825 7.859,-3.825
  pour cut-out: 39.942,42.1 cw(c39.942,39.814) 42.228,39.814 42.228,39.106 cw(c39.688,39.106) 39.688,36.566 38.501,36.566 cw(c38.501,38.777) 36.289,38.777
  pour cut-out: 10.301,41.958 ccw(c9.582,40.202) 7.684,40.202 7.684,38.387 ccw(c10.224,38.387) 10.224,35.847 11.523,35.847 ccw(c11.523,38.085) 13.762,38.085 13.762,39.16
Int1 (GND):
  pour cut-out: 9.97,42.1 ccw(c9.97,39.814) 7.684,39.814 7.684,38.35 ccw(c10.224,38.35) 10.224,35.81 11.533,35.81 ccw(c11.533,38.039) 13.762,38.039 13.762,38.72
  pour cut-out: 39.942,42.1 cw(c39.942,39.814) 42.228,39.814 42.228,39.074 cw(c39.688,39.074) 39.688,36.534 38.533,36.534 cw(c38.533,38.777) 36.289,38.777

## Silkscreen, mask and mechanical layers (free items; w line width, h text height)
Top Overlay:
  lines w0.254: 1.461,2.603 ccw(c2.731,2.603) 2.731,1.333 3.467,1.333 45.911,1.333 47.181,1.333 ccw(c47.181,2.603) 48.451,2.603 48.451,5.08 48.451,22.796 48.451,40.83 48.451,47.434 ccw(c47.562,47.434) 47.562,48.323 46.165,48.323 6.16,48.323 2.35,48.323 ccw(c2.35,47.434) 1.461,47.434 1.461,38.544 1.461,4.508 1.461,2.603
  text "OCXO timebase" at 17.463,49.593 h1.52
Bottom Overlay:
  text "JTAG" at 4.064,-9.017 h1.52 r270
  text "Micron-GLIN v.2 / (c)Shodan (Tula, Russia) / https://ampnuts.com" at 35.735,-27.835 h2.7 r270
Top Solder:
  rectangle: 31.496,-32.258 39.497,-29.083

## Dimensions
3.347,-39.136 to -0.063,-41.136 on Mechanical 1
3.347,56.864 to 0.318,58.864 on Mechanical 1
3.347,56.864 to -0.063,57.594 on Mechanical 1

## Text inside footprints (layer, text, board x,y; h text height)
P1: Bottom Overlay "36" at 1.823,-37.104 h0.75; Bottom Overlay "35" at 1.823,-39.644 h0.75; Bottom Overlay "1" at 48.813,-39.263 h0.75; Bottom Overlay "2" at 48.94,-36.85 h0.75
P2: Bottom Overlay "36" at 1.823,56.356 h0.75; Bottom Overlay "35" at 1.823,53.816 h0.75; Bottom Overlay "1" at 49.067,53.816 h0.75; Bottom Overlay "2" at 49.149,56.388 h0.75